# EAGLE board LBE-1420_Control (EAGLE 7.7.0)
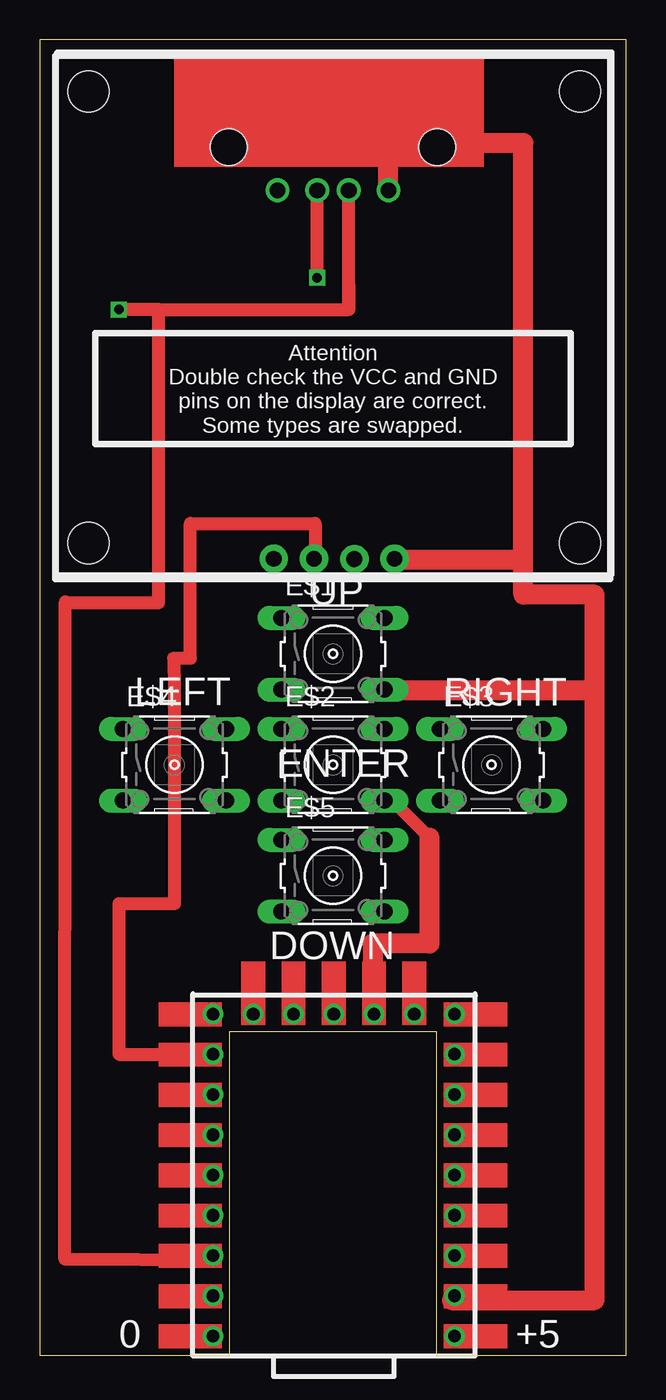
[diagram p0: board, top side]
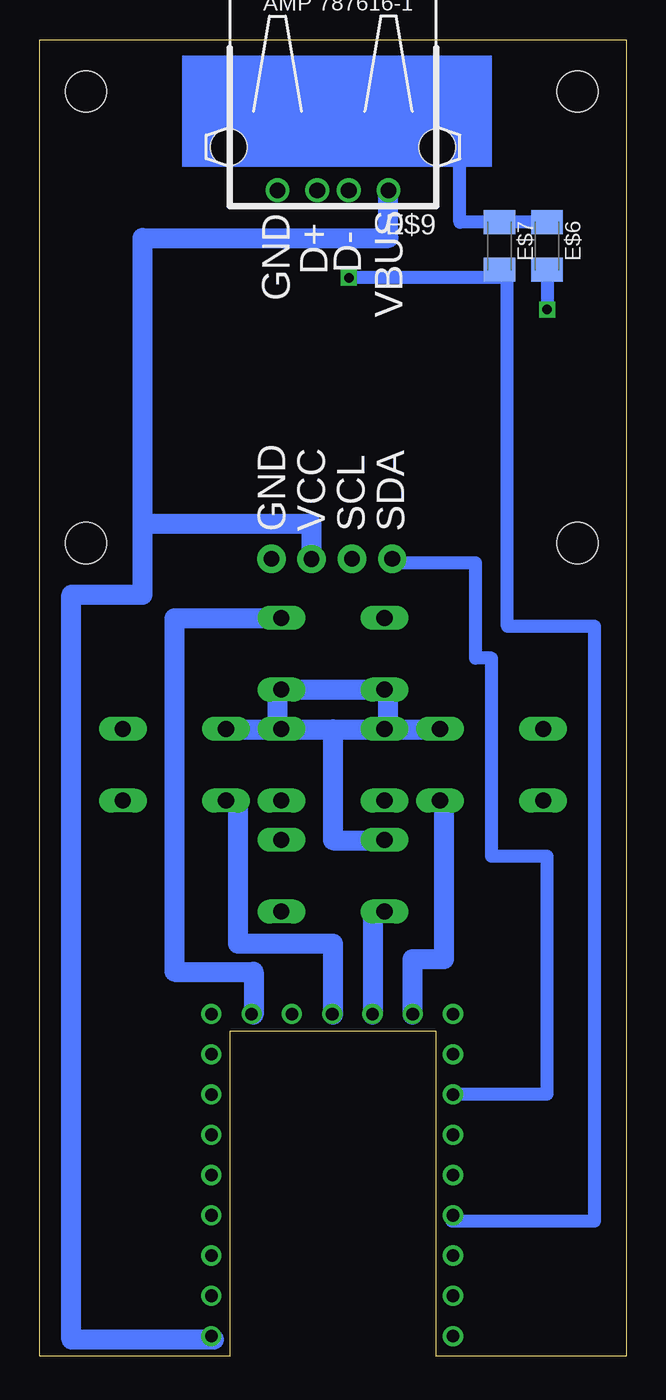
[diagram p1: board, bottom side, seen from below]

Size 37 x 83.06 mm. Coordinates in mm from the lower left corner, seen from the top.
Outline: 12,0 12,0.04
Outline: 12,0.04 12,20.5 25,20.5 25,0.04
Outline: 25,0.04 25,0
Outline: 25,0.04 37,0.04 37,83.06 0,83.06 0,0.04 12,0.04
Copper layers (1*16): Top 0.035mm / dielectric 1.5mm / Bottom 0.035mm
Design rules "default": minimum track width 10mil, minimum drill 24mil, track to track 8mil, track to pad 8mil, pad to pad 8mil, via to via 8mil, smd to smd 8mil, copper to edge 40mil, drill to drill 8mil, minimum pad ring 10mil, minimum via ring 8mil, stop-mask expansion 4mil, vias tented up to drill 0mil, thermal gap 10mil
Holes 2.6 mm at 34.08,51.29 3.08,51.29 34.08,79.79 3.08,79.79

## Footprints (pad centres in the part's own frame; a part is rotated, then mirrored left to right if it is on the bottom)
B3F-10XX = drill 1.016 long: 1 -3.251,2.261; 2 3.251,2.261; 3 -3.251,-2.261; 4 3.251,-2.261
C1206K = smd 1.5 x 2: 1 -1.5,0; 2 1.5,0
USB = drill 1: 1 -3.5,12.99; 2 -1,12.99; 3 1,12.99; 4 3.5,12.99 | hole 2.3: -6.57,10.28; 6.57,10.28

## Placement (x,y rotation side)
E$1  [B3F-10XX]  18.5,44.31 0 top
E$2  [B3F-10XX]  18.5,37.31 0 top
E$3  [B3F-10XX]  28.5,37.31 0 top
E$4  [B3F-10XX]  8.5,37.31 0 top
E$5  [B3F-10XX]  18.5,30.31 0 top
E$6  [C1206K]  5,70.04 270 bottom
E$7  [C1206K]  8,70.04 270 bottom
E$9  [USB]  18.5,86.54 180 bottom

## Library data of the parts
E$1-E$5 = switch-omron
E$6 E$7 = resistor
E$9 = con-amp

## Tracks (layer width: path | path; a pad name or v marks a point on that pad's centre or on a via)
S$1
  Top 1.27: 22.37,50.26 30.46,50.26 30.46,50.24
S$2  (via drill 0.8 pad 1.27)
  other vias: 10.93,1.27
S$3
  Bottom 1.27: 19.84,50.25 19.84,52.49 30.45,52.49
S$4
  Top 0.813: 8.5,44.04 9.5,44.04 9.5,52.54 17.38,52.54 17.38,50.23
S$5  (via drill 0.6)
  Top 0.813: 1.62,47.54 7.5,47.54 7.5,66.04 | 7.5,66.04 19.5,66.04 | 19.5,67.54 19.5,66.04 | 19.5,66.04 19.5,73.6 | 7.5,66.04 v5,66.04
  Bottom 0.813: 5,68.54 v5,66.04
S$6  (via drill 0.8 pad 1.27)
  other vias: 10.93,3.81
S$7  (via drill 0.8 pad 1.27)
  other vias: 10.93,6.35
S$8  (via drill 0.8 pad 1.27)
  other vias: 10.93,8.89
S$9  (via drill 0.8 pad 1.27)
  other vias: 10.93,11.43
S$10  (via drill 0.8 pad 1.27)
  other vias: 10.93,13.97
S$11  (via drill 0.8 pad 1.27)
  other vias: 10.93,16.51
S$12  (via drill 0.8 pad 1.27)
  other vias: 10.93,19.05
S$13  (via drill 0.8 pad 1.27)
  other vias: 10.93,21.59
S$14  (via drill 0.8 pad 1.27)
  other vias: 26.17,1.27
S$15  (via drill 0.8 pad 1.27)
  other vias: 26.17,3.81
S$16  (via drill 0.8 pad 1.27)
  other vias: 26.17,6.35
S$17  (via drill 0.8 pad 1.27)
  other vias: 26.17,8.89
S$18  (via drill 0.8 pad 1.27)
  other vias: 26.17,11.43
S$19  (via drill 0.8 pad 1.27)
  other vias: 26.17,13.97
S$20  (via drill 0.8 pad 1.27)
  other vias: 26.17,16.51
S$21  (via drill 0.8 pad 1.27)
  other vias: 26.17,19.05
S$22  (via drill 0.8 pad 1.27)
  other vias: 26.17,21.59
S$23  (via drill 0.8 pad 1.27)
  other vias: 23.63,21.59
S$24  (via drill 0.8 pad 1.27)
  other vias: 21.09,21.59
S$25  (via drill 0.8 pad 1.27)
  other vias: 18.55,21.59
S$26  (via drill 0.8 pad 1.27)
  other vias: 16.01,21.59
S$27  (via drill 0.8 pad 1.27)
  other vias: 13.47,21.59
S$28
  Bottom 1.27: 25,39.54 22,39.54 | 22,39.54 18.5,39.54 | 18.5,39.54 15,39.54 | 15,39.54 11.5,39.54 | 15,39.54 15,42.04 22,42.04 22,39.54 | 18.5,39.54 18.5,32.54 15,32.54
S$29
  Bottom 1.27: 11.5,35.04 11.5,25.04 13.5,25.04 13.5,21.54
S$30
  Bottom 1.27: 15,28.04 16,28.04 16,21.54
S$31
  Bottom 1.27: 25.5,35.04 24.5,35.04 24.5,26.04 18.5,26.04 18.5,21.54
S$32
  Top 0.813: 22,35.04 22.26,35.04 24.57,32.72
  Top 1.27: 21.5,35.04 22,35.04 | 24.57,32.72 24.57,26.04 21,26.04 21,21.54
S$33
  Bottom 1.27: 21.5,46.54 28.5,46.54 28.5,24.26 23.5,24.26 23.5,21.54
S$34
  Bottom 1.27: 26,1.04 35,1.04 35,48.04 30.5,48.04 30.5,70.54 15,70.54 15,73.54
S$35
  Top 1.27: 26,3.54 35,3.54 35,42.04 | 35,42.04 35,48.04 30.5,48.04 30.5,76.54 22,76.54 | 22,42.04 35,42.04 | 22,76.54 11.5,76.54 | 22,73.54 22,76.54
S$36
  Top 0.813: 11,6.04 1.6,6.13 1.62,47.59
S$37  (via drill 0.6)
  Top 0.813: v17.5,68.04 17.5,73.54
  Bottom 0.813: 11,8.54 2,8.54 2,46.04 7.5,46.04 7.5,68.04 v17.5,68.04
S$38
  Bottom 0.813: 11,16.54 5,16.54 5,31.54 8.5,31.54 8.5,44.04 9.5,44.04 9.5,50.04 14.76,50.04 14.76,50.25
S$39
  Top 0.813: 8.46,44.04 8.5,42.04 8.5,28.54 5,28.54 5,19.05 10.93,19.05
S$40
  Bottom 0.813: 10.5,76.04 10.5,71.54 5,71.54
S$43
  Top 0.813: 30.48,64.97 30.48,50
S$44  (via drill 1 pad 1.78)
  other vias: 19.85,50.29
S$45  (via drill 1 pad 1.78)
  other vias: 17.3,50.31
S$46  (via drill 1 pad 1.78)
  other vias: 22.38,50.31
S$47  (via drill 1 pad 1.78)
  other vias: 14.76,50.31
(copper drawn outside any net)
  shapes: Bottom area x1, Top area x28

## Text on the board
bSilk: D- | D+ | GND | VBUS | SDA | SCL | VCC | GND
tSilk: Attention / Double check the VCC and GND / pins on the display are correct. / Some types are swapped. | UP | LEFT | RIGHT | ENTER | DOWN | 0 | +5